# EAGLE board encoder (EAGLE 8.6.3)
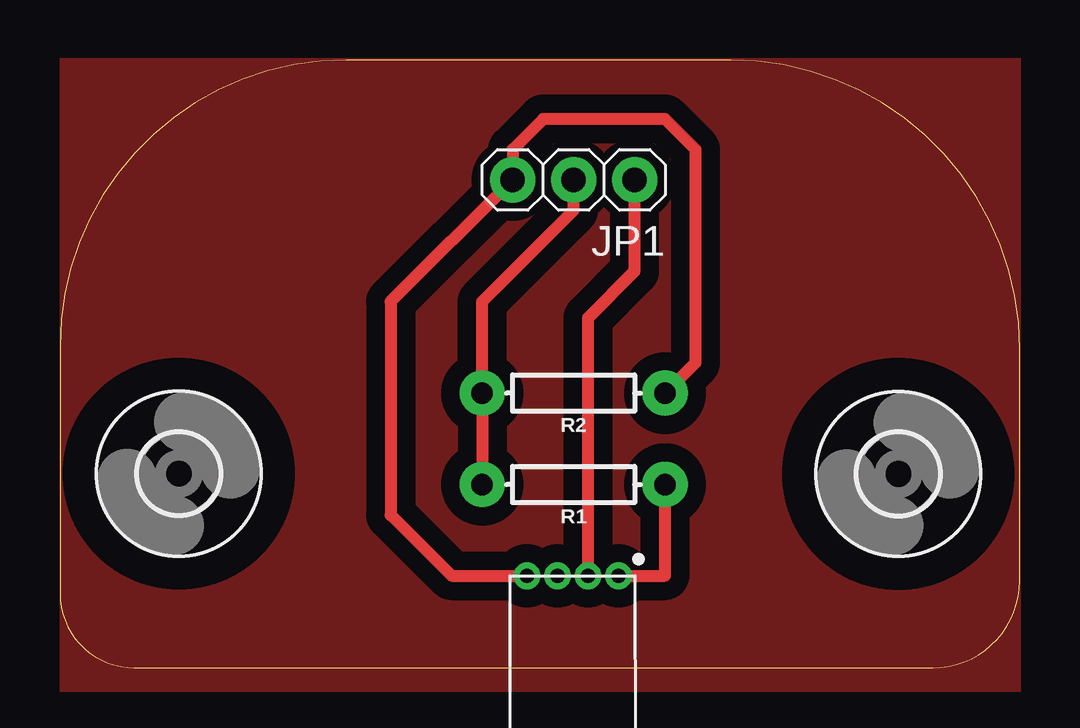
[diagram p0: board, top side]

Size 39.99 x 25.34 mm. Coordinates in mm from the lower left corner, seen from the top.
Outline: 0,13.42 0,3.09 arc90 3.09,0 36.36,0 arc90 39.99,3.63 39.99,13.29 arc90 27.94,25.34 11.92,25.34 arc90 0,13.42
Copper layers (1*16): Top 0.035mm / dielectric 1.5mm / Bottom 0.035mm
Design rules "default *": minimum track width 6mil, minimum drill 0.35mm, track to track 6mil, track to pad 6mil, pad to pad 6mil, via to via 6mil, smd to smd 6mil, copper to edge 0mil, drill to drill 2mil, minimum pad ring 10mil, minimum via ring 8mil, stop-mask expansion 4mil, vias tented up to drill 0mil, thermal gap 10mil

## Footprints (pad centres in the part's own frame; a part is rotated, then mirrored left to right if it is on the bottom)
3,3 = hole 3.3: 0,0
1X03 = drill 1.016 pad 1.88: 1 -2.54,0; 2 0,0; 3 2.54,0
AXIAL-0.3 = drill 0.9 pad 1.88: P$1 -3.81,0; P$2 3.81,0
S6986 = drill 0.6: 1 -1.87,0; 2 -0.6,0; 3 0.67,0; 4 1.94,0

## Placement (x,y rotation side)
H1  MOUNT-HOLE3.3  [3,3]  4.95,8.09 0 top
H2  MOUNT-HOLE3.3  [3,3]  34.93,8.08 0 top
JP1  [1X03]  21.4,20.34 180 top
R1  150  [AXIAL-0.3]  21.4,7.64 180 top
R2  10k  [AXIAL-0.3]  21.4,11.45 180 top
U$1  S6986  [S6986]  21.4,3.83 180 top

## Library data of the parts
H1 H2 = holes
JP1 = ee192; PIE-INT-REF-NUM: BULK-STOCK
R1 R2 = SparkFun-Resistors; PROD_ID: RES-12180
U$1 = ee192

## Nets
GND: JP1.1 U$1.2 U$1.3
N$1: JP1.2 R1.P$2 R2.P$2
N$3: JP1.3 R2.P$1 U$1.4
N$6: R1.P$1 U$1.1

## Tracks (layer width: path | path; a pad name or v marks a point on that pad's centre or on a via)
GND  (1 unrouted)
  Top 0.508: U$1.2 22,14.59 23.94,16.53 JP1.1
N$1
  Top 0.508: R1.P$2 R2.P$2 17.59,15.26 21.4,19.07 JP1.2
N$3
  Top 0.508: R2.P$1 26.48,12.72 26.48,21.61 25.21,22.88 20.13,22.88 18.86,21.61 JP1.3 13.78,15.26 13.78,6.37 16.32,3.83 U$1.4
N$6
  Top 0.508: U$1.1 25.21,3.83 R1.P$1
PLATE
  pour Top (isolate 0.762): 0,25.42 40.01,25.42 40.01,-1 0,-1